# EAGLE board pwm (EAGLE 6.5.0)
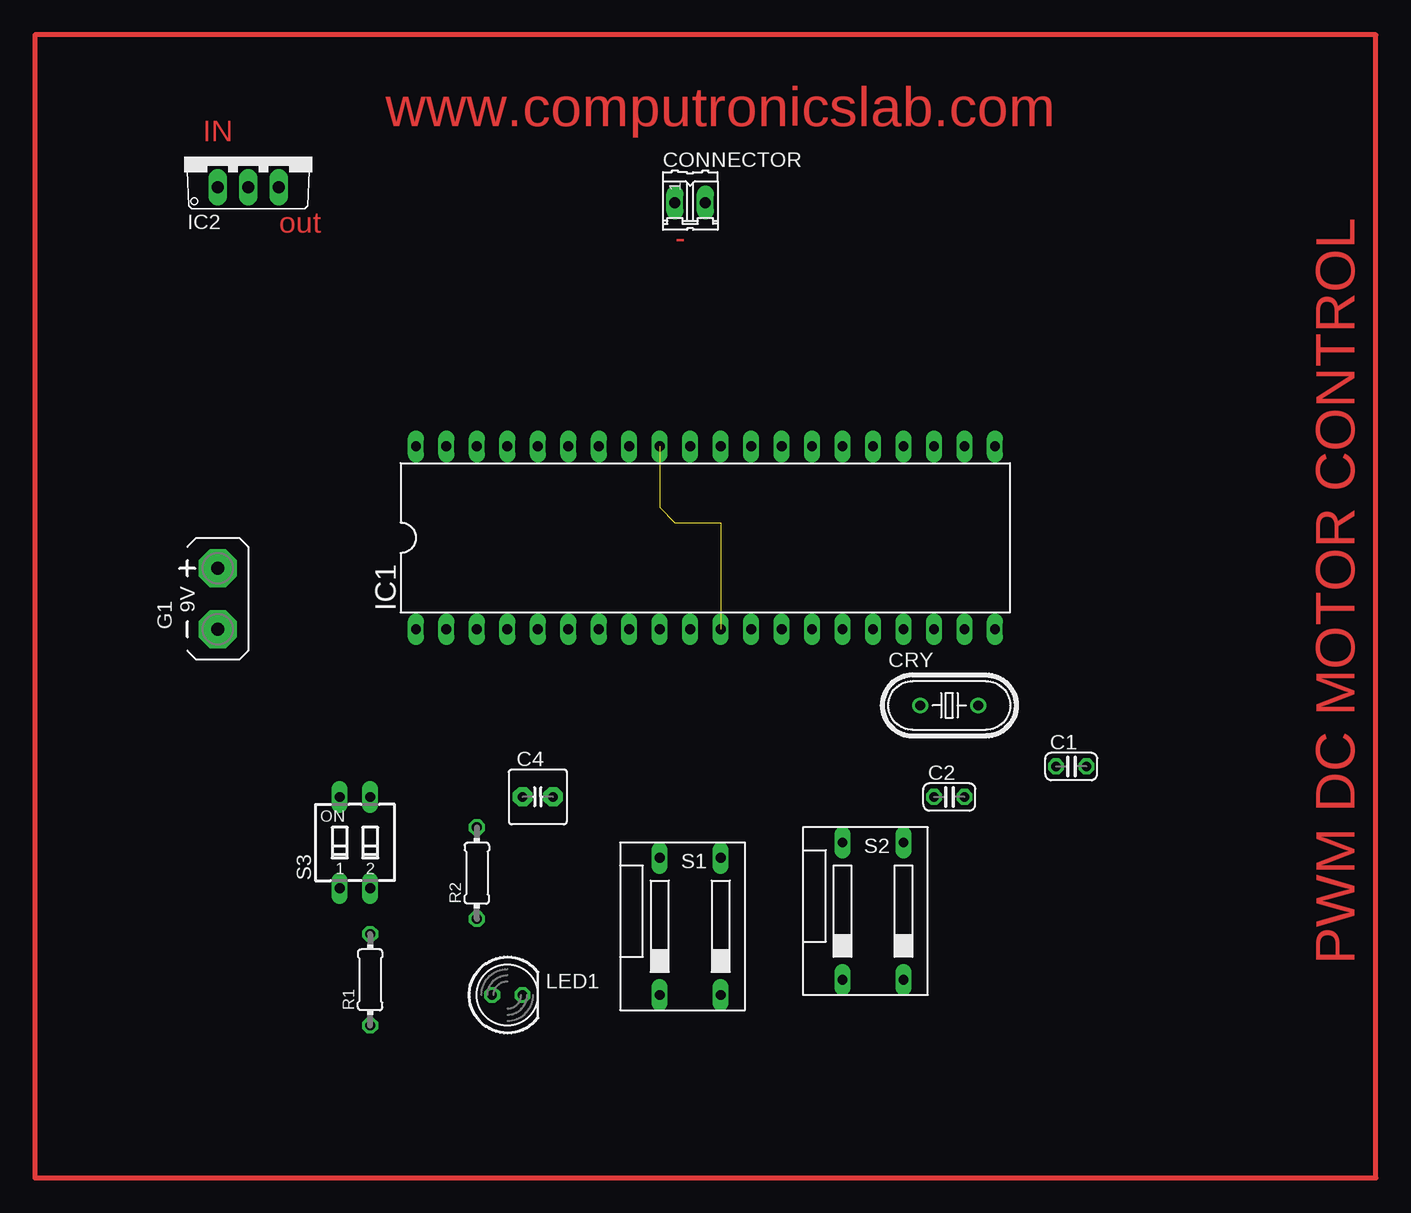
[diagram p0: board, top side]
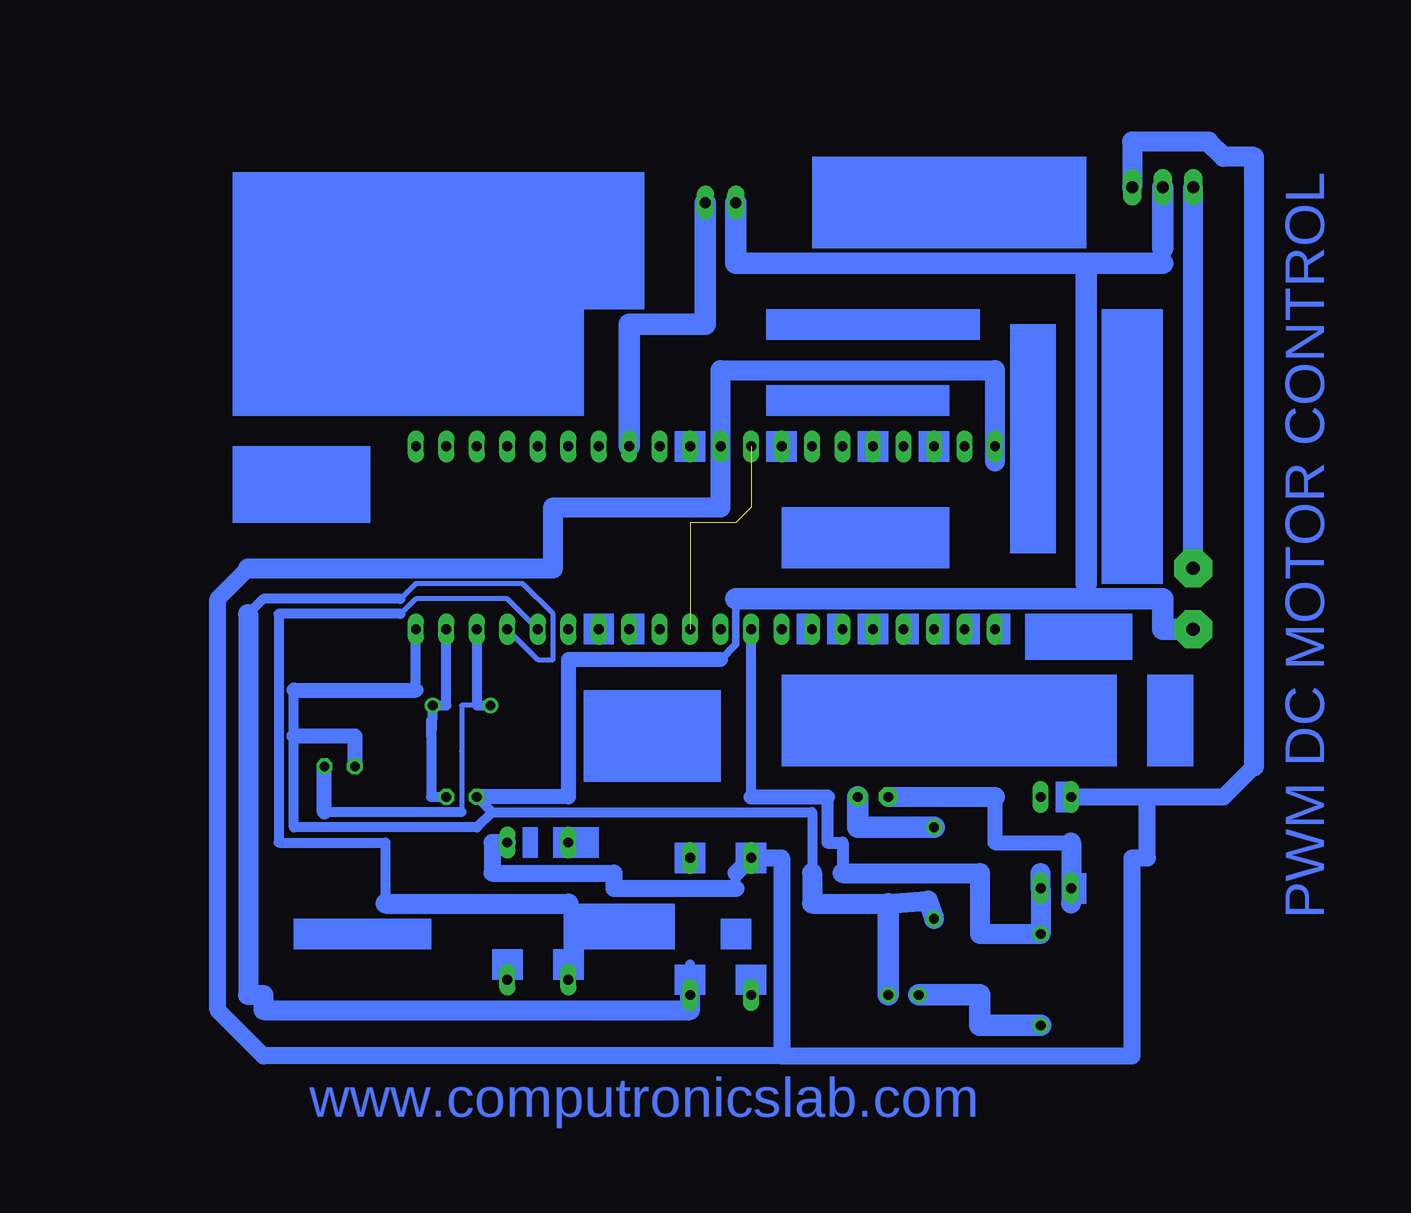
[diagram p1: board, bottom side, seen from below]

No outline drawn. Coordinates in mm, seen from the top.
Copper layers (1*16): Top 0.035mm / dielectric 1.5mm / Bottom 0.035mm
Design rules "default": minimum track width 10mil, minimum drill 24mil, track to track 8mil, track to pad 8mil, pad to pad 8mil, via to via 8mil, smd to smd 8mil, copper to edge 40mil, drill to drill 8mil, minimum pad ring 10mil, minimum via ring 8mil, stop-mask expansion 4mil, vias tented up to drill 0mil, thermal gap 10mil

## Footprints (pad centres in the part's own frame; a part is rotated, then mirrored left to right if it is on the bottom)
C025-024X044 = drill 0.813 octagon: 1 -1.27,0; 2 1.27,0
C2.5-5 = drill 0.813 pad 1.6 octagon: 1 -1.27,0; 2 1.27,0
02P = drill 0.914 long: 1 -1.27,0; 2 1.27,0
HC49U70 = drill 0.813: 1 -2.413,0; 2 2.413,0
AB9V = drill 1.118 pad 3.15 octagon: + 0,2.54; - 0,-2.54
DIL40 = drill 0.813 long: 1 -24.13,-7.62; 2 -21.59,-7.62; 3 -19.05,-7.62; 4 -16.51,-7.62; 5 -13.97,-7.62; 6 -11.43,-7.62; 7 -8.89,-7.62; 8 -6.35,-7.62; 9 -3.81,-7.62; 10 -1.27,-7.62; 11 1.27,-7.62; 12 3.81,-7.62; 13 6.35,-7.62; 14 8.89,-7.62; 15 11.43,-7.62; 16 13.97,-7.62; 17 16.51,-7.62; 18 19.05,-7.62; 19 21.59,-7.62; 20 24.13,-7.62; 21 24.13,7.62; 22 21.59,7.62; 23 19.05,7.62; 24 16.51,7.62; 25 13.97,7.62; 26 11.43,7.62; 27 8.89,7.62; 28 6.35,7.62; 29 3.81,7.62; 30 1.27,7.62; 31 -1.27,7.62; 32 -3.81,7.62; 33 -6.35,7.62; 34 -8.89,7.62; 35 -11.43,7.62; 36 -13.97,7.62; 37 -16.51,7.62; 38 -19.05,7.62; 39 -21.59,7.62; 40 -24.13,7.62
TO220V = drill 1.016 long: 1 -2.54,-2.54; 2 0,-2.54; 3 2.54,-2.54
LED5MM = drill 0.813 octagon: A -1.27,0; K 1.27,0
0204/7 = drill 0.813 octagon: 1 -3.81,0; 2 3.81,0
DS-02 = drill 0.813 long: 1 -5.08,-5.08; 2 0,-5.08; 3 0,6.35; 4 -5.08,6.35
SD4-02 = drill 0.813 long: 1 -1.27,-3.81; 2 1.27,-3.81; 3 1.27,3.81; 4 -1.27,3.81

## Placement (x,y rotation side)
C1  33pf  [C025-024X044]  80.01,21.59 0 top
C2  33pf  [C025-024X044]  69.85,19.05 0 top
C4  10uf  [C2.5-5]  35.56,19.05 0 top
CONNECTOR  2 PIN  [02P]  48.26,68.58 0 top
CRY  11.0592 mhz  [HC49U70]  69.85,26.67 0 top
G1  AB9V  [AB9V]  8.89,35.56 0 top
IC1  8051  [DIL40]  49.53,40.64 0 top
IC2  7805TV  [TO220V]  11.43,72.39 0 top
LED1  5MM  [LED5MM]  33.02,2.54 0 top
R1  220E  [0204/7]  21.59,3.81 90 top
R2  10K  [0204/7]  30.48,12.7 90 top
S1  PUSH SWITCH  [DS-02]  50.8,7.62 0 top
S2  PUSH SWITCH  [DS-02]  66.04,8.89 0 top
S3  PUSH SWITCH  [SD4-02]  20.32,15.24 0 top

## Library data of the parts
C1 C2 = rcl
C4 = capacitor-wima
CONNECTOR = con-amp-quick; OC_FARNELL: unknown; OC_NEWARK: unknown
CRY = crystal; OC_FARNELL: unknown; OC_NEWARK: unknown
G1 = battery
IC1 = microchip; MF: MICROCHIP; MPN: PIC18F4455-I/P; OC_FARNELL: 9321314; OC_NEWARK: 05K2028
IC2 = linear
LED1 = led
R1 R2 = eagle-ltspice; SPICEMODEL: NONE; SPICEPREFIX: R
S1 S2 = switch-dil; OC_FARNELL: 9472126; OC_NEWARK: unknown
S3 = switch-dil; OC_FARNELL: unknown; OC_NEWARK: unknown

## Nets
N$1: C1.2 CRY.1 IC1.18
N$2: C2.2 CRY.2 IC1.19
N$3: IC1.17 S1.2
N$4: G1.+ IC2.1
N$5: C4.2 R2.2
N$7: IC1.16 S2.1
N$8: C4.1 S3.1
N$9: C1.1 C2.1 CONNECTOR.1 G1.- IC1.20 IC2.2 LED1.K R2.1
N$10: IC1.9 R1.2 S3.2
N$11: LED1.A R1.1
N$14: CONNECTOR.2 IC1.28
N$15: IC1.31 IC2.3 S1.4 S2.3 S3.4
VDD: IC1.11 IC1.32
VSS: IC1.12

## Tracks (layer width: path | path; a pad name or v marks a point on that pad's centre or on a via)
N$1
  Bottom 0.406: 69.85,17.78 69.85,22.86 69.85,26.67 CRY.1
  Bottom 0.813: IC1.18 68.58,27.94 68.58,26.67 CRY.1 | 69.85,17.78 81.28,17.78
  Bottom 1.27: 81.28,17.78 C1.2
N$2
  Bottom 0.813: 72.39,24.13 CRY.2 71.12,26.67 IC1.19 | 72.39,24.13 72.39,25.4 | 72.39,24.13 72.39,19.05 C2.2
N$3
  Bottom 0.406: 74.93,35.56 73.66,36.83 64.77,36.83 62.23,34.29 62.23,30.48 63.5,30.48 IC1.17
  Bottom 0.813: S1.2 50.8,5.08 | 87.63,34.29 86.36,35.56 74.93,35.56
  Bottom 1.676: S1.2 50.8,1.27 86.36,1.27 86.36,2.54 87.63,2.54 87.63,34.29
N$4
  Bottom 1.676: G1.+ IC2.1
N$5
  Bottom 1.778: C4.2 36.83,16.51 R2.2
N$6
  Top 0.406: -6.35,82.55 -6.35,-12.7 105.41,-12.7 105.41,82.55 -6.35,82.55
N$7
  Bottom 0.406: 74.93,34.29 73.66,35.56 66.04,35.56 IC1.16
  Bottom 0.813: 76.2,10.16 76.2,15.24 85.09,15.24 85.09,34.29 74.93,34.29 | 60.96,10.16 S2.1
  Bottom 1.676: 76.2,10.16 60.96,10.16
N$8
  Bottom 0.254: 19.05,15.24 S3.1
  Bottom 1.27: 25.4,19.05 25.4,15.24 19.05,15.24
  Bottom 1.676: C4.1 25.4,19.05 | 19.05,15.24 19.05,10.16
N$9
  Bottom 0.254: 34.29,10.16 31.75,10.16 30.99,10.41 | 11.43,64.77 11.43,63.5 | 17.78,36.83 17.78,35.56 16.51,35.56
  Bottom 0.61: 48.26,30.48 46.99,31.75 46.99,35.56
  Bottom 0.813: 73.66,27.94 IC1.20 | 40.64,12.7 40.64,17.78 67.31,17.78 | C2.1 67.31,17.78 | 83.82,27.94 83.82,24.13 83.82,16.51 68.58,16.51 67.31,17.78
  Bottom 1.27: C1.1 78.74,24.13 83.82,24.13 | 83.82,27.94 73.66,27.94 | C2.1 60.96,19.05 60.96,30.48 48.26,30.48
  Bottom 1.676: 40.64,12.7 40.64,10.16 34.29,10.16 30.99,10.41 R2.1
  Bottom 1.778: 34.29,10.16 LED1.K | CONNECTOR.1 46.99,63.5 17.78,63.5 | IC2.2 11.43,64.77 | 11.43,63.5 17.78,63.5 | G1.- 11.43,33.02 11.43,35.56 16.51,35.56 46.99,35.56 | 17.78,63.5 17.78,36.83
N$10
  Bottom 0.813: 45.72,19.05 IC1.9
  Bottom 1.016: 38.1,12.7 38.1,15.24 39.37,15.24 39.37,19.05
  Bottom 1.27: 45.72,19.05 39.37,19.05
  Bottom 1.676: 21.59,12.7 S3.2 R1.2 26.67,7.62 26.67,12.7 38.1,12.7
N$11
  Bottom 1.778: R1.1 26.67,0 26.67,2.54 LED1.A
N$14
  Bottom 1.778: IC1.28 55.88,58.42 49.53,58.42 CONNECTOR.2
N$15
  Bottom 0.254: 12.7,19.05 S3.4 | 6.35,72.39 5.08,72.39
  Bottom 0.813: 46.99,11.43 46.99,12.7
  Bottom 1.422: 46.99,12.7 S1.4 43.18,13.97 43.18,-2.54 | 46.99,11.43 57.15,11.43 57.15,12.7 67.31,12.7 67.31,15.24 S2.3 | 12.7,19.05 12.7,13.97 13.97,13.97 13.97,-2.54 43.18,-2.54 | 87.63,38.1 90.17,35.56 90.17,1.27 86.36,-2.54 43.18,-2.54 | 3.81,21.59 6.35,19.05 S3.4
  Bottom 1.676: 87.63,38.1 62.23,38.1 62.23,43.18 48.26,43.18 IC1.31 48.26,54.61 25.4,54.61 25.4,46.99 | IC2.3 13.97,73.66 7.62,73.66 6.35,72.39 3.81,72.39 3.81,21.59
VDD  (4 unrouted)
(copper drawn outside any net)
  shapes: Bottom area x39

## Text on the board
Top: www.computronicslab.com | IN | PWM DC MOTOR CONTROL | out | -
Bottom: PWM DC MOTOR CONTROL | www.computronicslab.com